# Altium PCB Watch-PCB.PcbDoc
Units mm, origin at the board's own origin, x right, y up, seen from the top; angles counter-clockwise.
Board outline 28.59 x 54.62 mm, 2 copper layers (Top Layer, Bottom Layer), stack 1.569 mm thick; 23 components, 43 nets, 125 pads, 186 vias.
Unrouted connection lines stored in the file: 17.
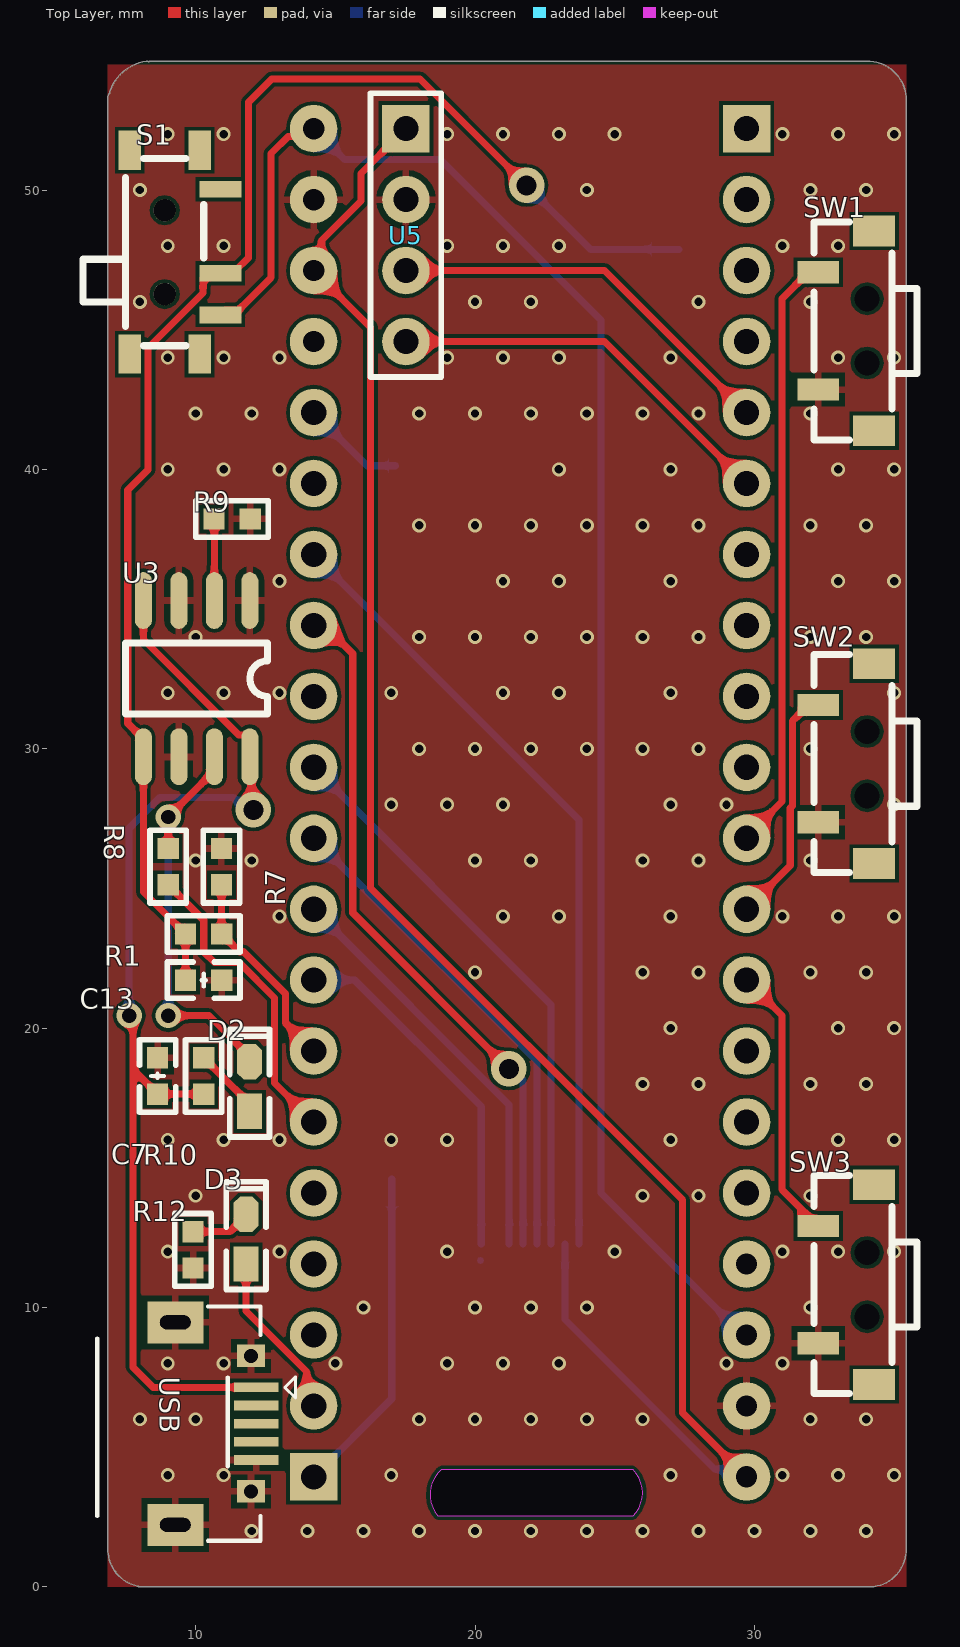
[diagram p0: Top Layer view]
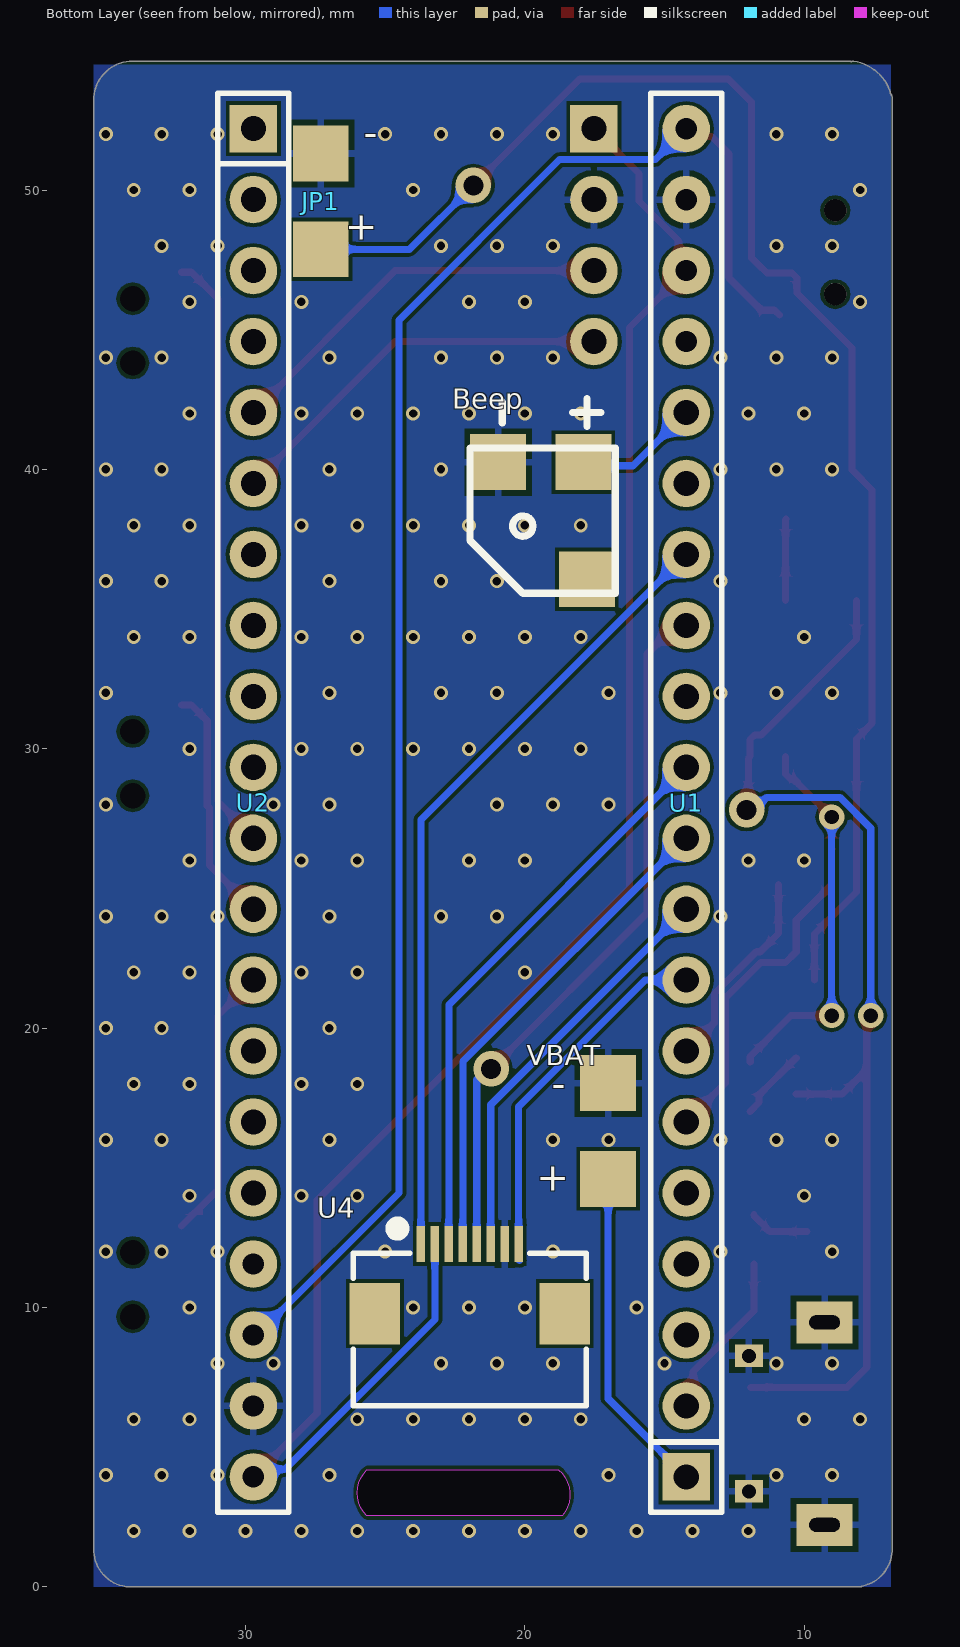
[diagram p1: Bottom Layer view, seen from below]

## Layer stack, top to bottom
Top Solder: solder mask 0.0254, SM-001, Dk 4
Top Layer: signal copper 0.035
Dielectric 1: core 1.4986, Core-043, Dk 4.3
Bottom Layer: signal copper 0.035
Bottom Solder: solder mask 0.0254, SM-001, Dk 4

## Board outline
6.858,1.4 ccw(c8.191,1.333) 7.925,0.025 ccw(c8.001,0.127) 8.001,0 34.033,0 ccw(c34.099,1.333) 34.17,0 ccw(c34.099,1.333) 35.433,1.263 ccw(c35.306,1.27) 35.433,1.27 35.433,53.08 ccw(c34.036,53.213) 35.44,53.213 ccw(c34.036,53.213) 34.036,54.617 ccw(c34.036,54.489) 33.996,54.61 8.382,54.61 ccw(c8.382,54.483) 8.319,54.593 ccw(c8.255,54.483) 8.239,54.609 ccw(c8.445,53.023) 6.899,53.434 ccw(c6.985,53.34) 6.858,53.34 6.858,53.221 ccw(c8.445,53.023) 6.858,52.824
cut-out: 18.669,2.54 25.654,2.54 ccw(c24.828,3.365) 25.654,4.191 18.796,4.191 ccw(c19.558,3.302)

## Design rules (kind name [scope] priority, off if disabled: settings)
Clearance [All] p1: gap=0.127 ignorepadtopadclearanceinfootprint=FALSE
Height [All] p1: minheight=0 maxheight=1817.048 prefheight=12.7
PolygonConnect [All] p1: connectstyle=Relief reliefconductorwidth=0.254 reliefentries=4 polygonreliefangle="90 Angle" airgapwidth=0.204
RoutingVias [All] p1: holewidth=0.711 width=1.27 viastyle="Through Hole" minholewidth=0.711 minwidth=1.27 maxholewidth=0.711 maxwidth=1.27
SolderMaskExpansion [All] p1: expansion=0.102 istentingtop=FALSE
Width [All] p1: maxlimit=10 minlimit=0.254 preferedwidth=0.254 minimp=50.000000 maximp=50.000000 favimp=50.000000
29 further rules are at their usual default settings.

## Classes and differential pairs
component class Watch-Sheet: Beep C7 C13 D2 D3 JP1 R1 R7 R8 R9 R10 R12 S1 SW1 SW2 SW3

## Components (designator, comment, footprint, x,y, rotation, side; value= is the part's Value field where it differs from the comment)
Beep "2PIN" 5020beep 21.19,52.705 r90 bottom
C7 "10UF" "C 0603_L" 8.636,18.288 r270 top
C13 "10UF" "C 0603_L" 10.287,21.717 r180 top
D2 "绿色" "LED 0603R" 11.938,17.907 r90 top
D3 "红色" "LED 0603R" 11.811,12.446 r90 top
JP1 "2PIN" 2PIN 20.574,54.991 r90 bottom
R1 "10k" "R 0603_L" 10.287,23.368 r180 top
R7 "10k" "R 0603_L" 10.922,25.781 r270 top
R8 "1K" "R 0603_L" 9.017,25.781 r270 top
R9 "1.2K" "R 0603_L" 11.303,38.227 r180 top
R10 "4.7K" "R 0603_L" 10.287,18.288 r270 top
R12 "1K" "R 0603_L" 9.906,12.065 r270 top
S1 "MTS-10x" MSK-12C01-07 8.89,47.776 r270 top
SW1 "3x6x5" "TSW 3*6*4.3-S-W" 34.036,44.958 r90 top
SW2 "3x6x5" "TSW 3*6*4.3-S-W" 34.036,29.468 r90 top
SW3 "3x6x5" "TSW 3*6*4.3-S-W" 34.036,10.819 r90 top
U1 "stm32f4" HDR2.54-LI-20P 14.224,28.067 r90 bottom
U2 "stm32f4" HDR2.54-LI-20P 29.718,28.067 r270 bottom
U3 "TP4056" SOP8 11.963,35.281 r270 top
U4 "LCD" "FPC0.5 2H-WS-8P" 21.971,9.779 r180 bottom
U5 "MPU6050" HDR2.54-LI-4P 17.526,48.387 r270 top
VBAT "2PIN" 2PIN 23.749,10.922 r270 bottom
? "Micro USB" USB-micro_A 9.271,5.842 r270 top

## Footprints (in the part's own frame and the unit in brackets; to place one, negate y for a bottom-side part, rotate by r counter-clockwise, add the part's x,y. Pads: shape width x height; smd on the part's side, far side on the other; paste and mask are expansions set on the pad)
2PIN [mm]
  rect 2x2 smd: 1(-3.683,6.731) 2(-7.112,6.731)
5020beep [mm] "5020beep"
  rect 2x2 smd: 1(-12.446,-0.235) 2(-12.446,-3.283) " "(-16.637,-3.41)
  silkscreen extent -17.14,-4.43 -10.16,0.78, body extent -17.15,-4.36 -11.94,0.72, height 2.01
"C 0603_L" [mil] "无极性贴片电容"
  rect 30x30 smd: 1(-25.59,0) 2(25.59,0)
  silkscreen extent -51,-26 51,26, body extent -31,-16 31,16, height 32
"FPC0.5 2H-WS-8P" [mm] "长：8.2mm，宽：5.2mm，高：2mm"
  rect 1.8x2.2 smd: 0(-3.4,0) 0(3.4,0)
  rect 0.3x1.3 smd: 1(-1.75,2.497) 2(-1.25,2.497) 3(-0.75,2.497) 4(-0.25,2.497) 5(0.25,2.497) 6(0.75,2.497) 7(1.25,2.497) 8(1.75,2.497)
  silkscreen extent -4.17,-3.3 4.17,3.23, body extent -4.1,-3.15 4.1,2.85, height 2
HDR2.54-LI-4P [mm] "排针，4脚"
  rect 1.7x1.7 hole 0.9: 1(-3.81,0)
  round 1.7 hole 0.9: 2(-1.27,0) 3(1.27,0) 4(3.81,0)
  silkscreen extent -5.08,-1.27 5.08,1.27, body extent -5.08,-1.27 5.08,1.27, height 8.5
HDR2.54-LI-20P [mm] "排针，20脚"
  rect 1.7x1.7 hole 0.9: 1(-24.13,0)
  round 1.7 hole 0.9: 2(-21.59,0) 3(-19.05,0) 4(-16.51,0) 5(-13.97,0) 6(-11.43,0) 7(-8.89,0) 8(-6.35,0) 9(-3.81,0) 10(-1.27,0) 11(1.27,0) 12(3.81,0) 13(6.35,0) 14(8.89,0) 15(11.43,0) 16(13.97,0)
  round 1.7 hole 0.762: 17(16.51,0) 18(19.05,0) 19(21.59,0) 20(24.13,0)
  silkscreen extent -25.4,-1.27 25.4,1.27, body extent -25.4,-1.27 25.4,1.27, height 8.5
"LED 0603R" [mil] "红色0603LED"
  rect 50x35 smd: 1(-35,0.26)
  oct 50x35 smd: 2(35,0.26)
  silkscreen extent -71,-28 81,28, body extent -31,-16 31,16, height 18
MSK-12C01-07 [mm] "6.7*2.8*1.5mm(长宽高）"
  rect 1.4x0.8 smd: 0(-3.65,-1.25) 0(-3.65,1.25) 0(3.65,-1.25) 0(3.65,1.25)
  rect 0.6x1.5 smd: 1(-2.25,1.996) 2(0.75,1.996) 3(2.25,1.996)
  round 0.8 hole 0.8: " "(-1.5,0) " "(1.5,0)
  silkscreen extent -3.35,-2.92 3.35,1.4, body extent -3.92,-2.9 3.92,2.4, height 1.5
"R 0603_L" [mil] "1/10W贴片电阻"
  rect 30x30 smd: 1(-25.59,0) 2(25.59,0)
  silkscreen extent -51,-26 51,26, body extent -31,-16 32,16, height 16
SOP8 [mil] "（蒜米工坊）"
  oval 80x24 smd: 1(-1,-1) 2(-1,-51) 3(-1,-101) 4(-1,-151) 5(219,-151) 6(219,-101) 7(219,-51) 8(219,-1)
  silkscreen extent 59,-176 159,24, body extent -4,-174 234,24, height 63
"TSW 3*6*4.3-S-W" [mm] "侧立贴片3*6*4.3"
  rect 1.1x1.5 smd: 0(-3.575,-0.25) 0(3.575,-0.25)
  round 0 hole 0.9: 0(-1.15,0) 0(1.15,0)
  rect 0.8x1.5 smd: 1(2.1,1.75) 2(-2.1,1.75)
  silkscreen extent -3.9,-1.78 3.9,1.91, body extent -3.9,-1.79 3.9,1.91, height 3.51
USB-micro_A [mm] "micro型USB ，5.7*7.8*2.5mm"
  rect 0.35x1.6 smd: 1(-1.3,2.9) 2(-0.65,2.9) 3(0,2.9) 4(0.65,2.9) 5(1.3,2.9)
  rect 1.5x2 hole 0.5 slot 1.1 at 90 deg: 5(-3.625,0) 5(3.625,0)
  rect 0.8x1 hole 0.5: 5(-2.425,2.71) 5(2.425,2.71)
  silkscreen extent -4.19,-2.79 4.19,4.3, body extent -4,-2.71 4,2.89, height 2.8

## Part data
C7 C13: library part "0402 CAP"
D2 D3: library part LED-SMD, "贴片LED", BOM名称=贴片LED, 学习资源=www.ooocke.com, 版权归属=源创客
R1 R7 R8 R9 R10 R12: library part R, "贴片电阻", BOM名称=贴片电阻, 学习资源=www.ooocke.com, 版权归属=源创客
S1: "MTS10x系列3脚扭子开关", BOM名称=MTS10x系列3脚扭子开关, 学习资源=www.ooocke.com, 版权归属=源创客
SW1 SW2 SW3: library part "TSW 3x6", "3x6轻触开关", BOM名称=3x6轻触开关, 学习资源=www.ooocke.com, 版权归属=源创客
U4: "屏幕接口"
U5: library part MPU6050_

## Via types
v1: diameter 0.5, hole 0.3, Top Layer to Bottom Layer, 180 vias
v2: diameter 0.9, hole 0.511, Top Layer to Bottom Layer, 3 vias
v3: diameter 1.27, hole 0.711, Top Layer to Bottom Layer, 3 vias

## Nets (pads, with @x,y where several pads share a name; then routed paths per layer and width w, separated by ;. In a path a pad name is that pad's centre, name@x,y a point inside that pad or via, vN(x,y) a via of type N, cw(c..) or ccw(c..) an arc to the next point about the centre after c; other vN are vias at no path point)
3V3: U1.18 U2.20 U4.2 U5.1 | length 67.6
  Top Layer w0.254: U5.1 15.92,50.591 15.92,49.612 14.501,48.193 14.501,47.394 U1.18 16.256,45.085 16.256,25.019 27.432,13.843 27.432,6.223 28.818,4.837 U2.20
  Bottom Layer w0.254: U4.2 23.221,9.57 28.577,4.214 29.441,4.214 U2.20
5V: S1.3 U1.20 U2.18 | length 60.4
  Top Layer w0.254: S1.3 11.059,45.699 11.536,45.699 12.7,46.863 12.7,51.308 13.312,51.92 13.947,51.92 U1.20
  Bottom Layer w0.254: U1.20 15.328,51.093 18.757,51.093 24.511,45.339 24.511,14.097 29.591,9.017 U2.18
BAT_CHG: R8.2 U1.6 | length 11.2
  Top Layer w0.254: R8.2 10.287,23.861 10.287,22.733 10.668,22.352 11.557,22.352 12.827,21.082 12.827,18.034 U1.6
BAT_VOL: R1.1 R7.2 U1.7 | length 7.4
  Top Layer w0.254: R7.2 10.922,23.383 11.572,22.733 11.715,22.733 13.208,21.24 13.208,20.193 U1.7
Beep: Beep.2 U1.16 | length 3.7
  Bottom Layer w0.254: U1.16 16.129,40.132 Beep.2@17.145,40.132
GND: ?.5 Beep.1 C7.1 C13.1 JP1.1 R7.1 R9.1 R12.2 SW1.2 SW2.2 SW3.2 U1.19 U2.19 U3.1 U3.3 U3.6 U4.7 U5.2 VBAT.2 | length 0.6
  Top Layer w0.254: ?.5@9.271,2.217 ?.5@9.329,2.159 ; ?.5@11.881,3.417 11.981,3.417 ?.5@12.171,3.607 ; ?.5@11.881,8.267 ?.5@11.981,8.267
  other v1: 12,2 14,2 16,2 18,2 20,2 22,2 24,2 26,2 28,2 30,2 32,2 34,2 9,4 11,4 17,4 27,4 31,4 33,4 35,4 8,6 10,6 18,6 20,6 22,6 24,6 26,6 32,6 34,6 9,8 11,8 15,8 19,8 21,8 23,8 29,8 31,8 16,10 20,10 22,10 24,10 32,10 9,12 13,12 19,12 25,12 31,12 33,12 35,12 10,14 26,14 28,14 32,14 9,16 11,16 13,16 17,16 19,16 27,16 33,16 35,16 26,18 28,18 32,18 34,18 27,20 33,20 35,20 20,22 26,22 28,22 32,22 34,22 13,24 21,24 23,24 27,24 31,24 33,24 35,24 10,26 12,26 20,26 22,26 26,26 28,26 32,26 17,28 19,28 21,28 27,28 29,28 35,28 18,30 20,30 22,30 24,30 26,30 28,30 32,30 9,32 11,32 13,32 17,32 21,32 23,32 27,32 35,32 10,34 18,34 20,34 22,34 24,34 26,34 28,34 32,34 34,34 13,36 21,36 23,36 27,36 33,36 35,36 18,38 20,38 22,38 24,38 26,38 28,38 32,38 34,38 9,40 11,40 13,40 23,40 27,40 33,40 35,40 10,42 12,42 18,42 20,42 22,42 24,42 26,42 28,42 32,42 9,44 11,44 13,44 19,44 21,44 23,44 27,44 33,44 35,44 8,46 20,46 22,46 28,46 32,46 9,48 11,48 19,48 21,48 23,48 31,48 33,48 8,50 24,50 32,50 34,50 9,52 11,52 19,52 21,52 23,52 25,52 31,52 33,52 35,52
KEY1: SW1.1 U2.11 | length 21.5
  Top Layer w0.254: U2.11 29.718,26.848 30.988,28.118 30.988,46.11 31.936,47.058 SW1.1
KEY2: SW2.1 U2.12 | length 8.6
  Top Layer w0.254: U2.12 31.282,25.821 31.282,27.873 31.369,27.96 31.369,31.001 31.936,31.568 SW2.1
KEY3: SW3.1 U2.13 | length 9.9
  Top Layer w0.254: U2.13 30.988,20.447 30.988,14.217 SW3.1
LCD_BLK: U1.8 U4.8 | length 12.8
  Bottom Layer w0.254: U1.8 15.694,21.717 20.221,17.19 U4.8 ; U4.8@20.193,11.684 U4.8@20.198,11.689
LCD_CS: U1.14 U4.1 | length 28.6
  Bottom Layer w0.254: U1.14 23.721,27.46 U4.1
LCD_DC: U1.13 U4.5 | length 25.1
  Top Layer w0.254: U1.13 14.605,34.417 15.621,33.401 15.621,24.13 v3(21.209,18.542)
  Bottom Layer w0.254: v3@21.59,18.288 21.721,18.157 U4.5
LCD_RES: U1.9 U4.6 | length 14.9
  Bottom Layer w0.254: U1.9 21.221,17.26 U4.6
LCD_SCL: U1.11 U4.3 | length 20.6
  Bottom Layer w0.254: U1.11 22.721,20.84 U4.3
LCD_SDA: U1.10 U4.4 | length 17.8
  Bottom Layer w0.254: U1.10 22.221,18.8 U4.4
LED: D3.1 U1.2 | length 6.1
  Top Layer w0.254: D3.1 11.804,9.875 13.972,7.708 13.972,6.729 U1.2
MPU_SCL: U2.5 U5.3 | length 14.3
  Top Layer w0.254: U5.3 24.638,47.117 U2.5
MPU_SDA: U2.6 U5.4 | length 14.3
  Top Layer w0.254: U5.4 24.638,44.577 U2.6
NetD2_1: D2.1 R10.1 | length 2.6
  Top Layer w0.254: R10.1 11.614,17.611 11.614,17.336 D2.1
NetD2_2: D2.2 R8.1 U3.7 | length 14.9
  Top Layer w0.254: R8.1@9.002,26.416 R8.1 v2(9.017,27.559) 10.397,28.939 10.504,28.939 10.668,29.103 U3.7 ; v2(9.017,20.447) 10.471,20.447 11.931,18.987 D2.2
  Bottom Layer w0.254: v2(9.017,20.447) v2(9.017,27.559)
NetD3_2: D3.2 R12.1 | length 2.2
  Top Layer w0.254: R12.1@9.913,12.722 R12.1 11.227,12.715 11.804,13.292 D3.2
NetR9_2: R9.2 U3.2 | length 2.9
  Top Layer w0.254: R9.2 10.668,38.212 U3.2
NRST: U1.5
PA6: U1.12
PA10: U2.7
PA11: U2.8
PA12: U2.9
PA15: U2.10
PB1: U1.15
PB6: U2.14
PB7: U2.15
PB8: U2.16
PB9: U2.17
PB10: U1.17
PB12: U2.1
PB13: U2.2
PB14: U2.3
PB15: U2.4
PC14: U1.3
PC15: U1.4
V_bat: U1.1 VBAT.1 | length 11.8
  Bottom Layer w0.254: U1.1 17.018,6.731 VBAT.1
V_USB: ?.1 C7.2 R10.2 U3.4 U3.8 | length 41
  Top Layer w0.254: v2(7.62,20.447) 7.763,20.304 7.763,18.511 ; U3.4 8.128,33.909 11.54,30.497 11.774,30.497 11.938,30.333 U3.8 12.002,29.654 12.002,27.877 v3(12.065,27.813) ; R10.2 C7.2 7.763,18.511 ; ?.1@11.917,7.142 8.479,7.142 7.763,7.858 7.763,18.511
  Bottom Layer w0.254: v2(7.62,20.447) 7.62,27.158 8.725,28.263 11.34,28.263 11.79,27.813 v3(12.065,27.813)
VIN: C13.2 JP1.2 R1.2 S1.2 U3.5 | length 52.9
  Top Layer w0.254: C13.2 R1.2 8.128,24.877 8.128,29.345 8.128,30.353 7.569,30.912 7.569,39.261 8.294,39.986 8.294,44.343 10.263,46.312 10.263,46.853 10.436,47.026 S1.2 11.336,47.026 11.681,47.371 11.684,47.371 11.89,47.577 11.89,53.143 12.722,53.975 18.034,53.975 v3(21.844,50.165)
  Bottom Layer w0.254: v3(21.844,50.165) 24.13,47.879 JP1.2
pads on no net: "Beep. " "S1. " ?.2 ?.3 ?.4 S1.0 S1.1 SW1.0 SW2.0 SW3.0 U4.0

## Polygon pours and split planes (outlines as drawn)
GND on Bottom Layer "GND_L02_P001" (solid, pour order 1): 6.899,54.483 35.433,54.483 35.433,0 6.899,0
GND on Top Layer "GND_L01_P000" (solid, pour order 0): 35.433,54.483 35.433,0 6.858,0 6.858,54.483

## Silkscreen, mask and mechanical layers (free items; w line width, h text height)
Bottom Overlay:
  text "-" at 25.273,51.562 h1.02
  text "+" at 25.273,48.218 h1.02
  text "-" at 18.542,17.526 h1.02
  text "+" at 18.415,14.182 h1.02
Mechanical 13:
  lines w0.254: 6.985,52.832 cw(c8.445,53.023) 8.255,54.483 ; 6.985,53.34 6.985,1.397 ccw(c8.191,1.333) 8.128,0.127 ; 8.001,0.127 34.163,0.127 ; 8.382,54.483 8.636,54.483 34.036,54.483 ; 34.036,0.127 ccw(c34.099,1.333) 35.306,1.27 35.306,53.086 ccw(c34.036,53.213) 34.036,54.489 ; 18.669,2.54 cw(c19.558,3.302) 18.796,4.191 25.654,4.191 cw(c24.828,3.365) 25.654,2.54 18.669,2.54

## Text inside footprints (layer, text, board x,y; h text height)
?: Top Overlay "USB" at 8.711,7.524 h0.72 r270